# Altium PCB RPI 3.PcbDoc
Units mil, origin at the board's own origin, x right, y up, seen from the top; angles counter-clockwise.
Board outline 2558.74 x 2204.72 mil, 2 copper layers (Top Layer, Bottom Layer), stack 67.192 mil thick; 23 components, 43 nets, 141 pads, 0 vias.
Unrouted connection lines stored in the file: 1.
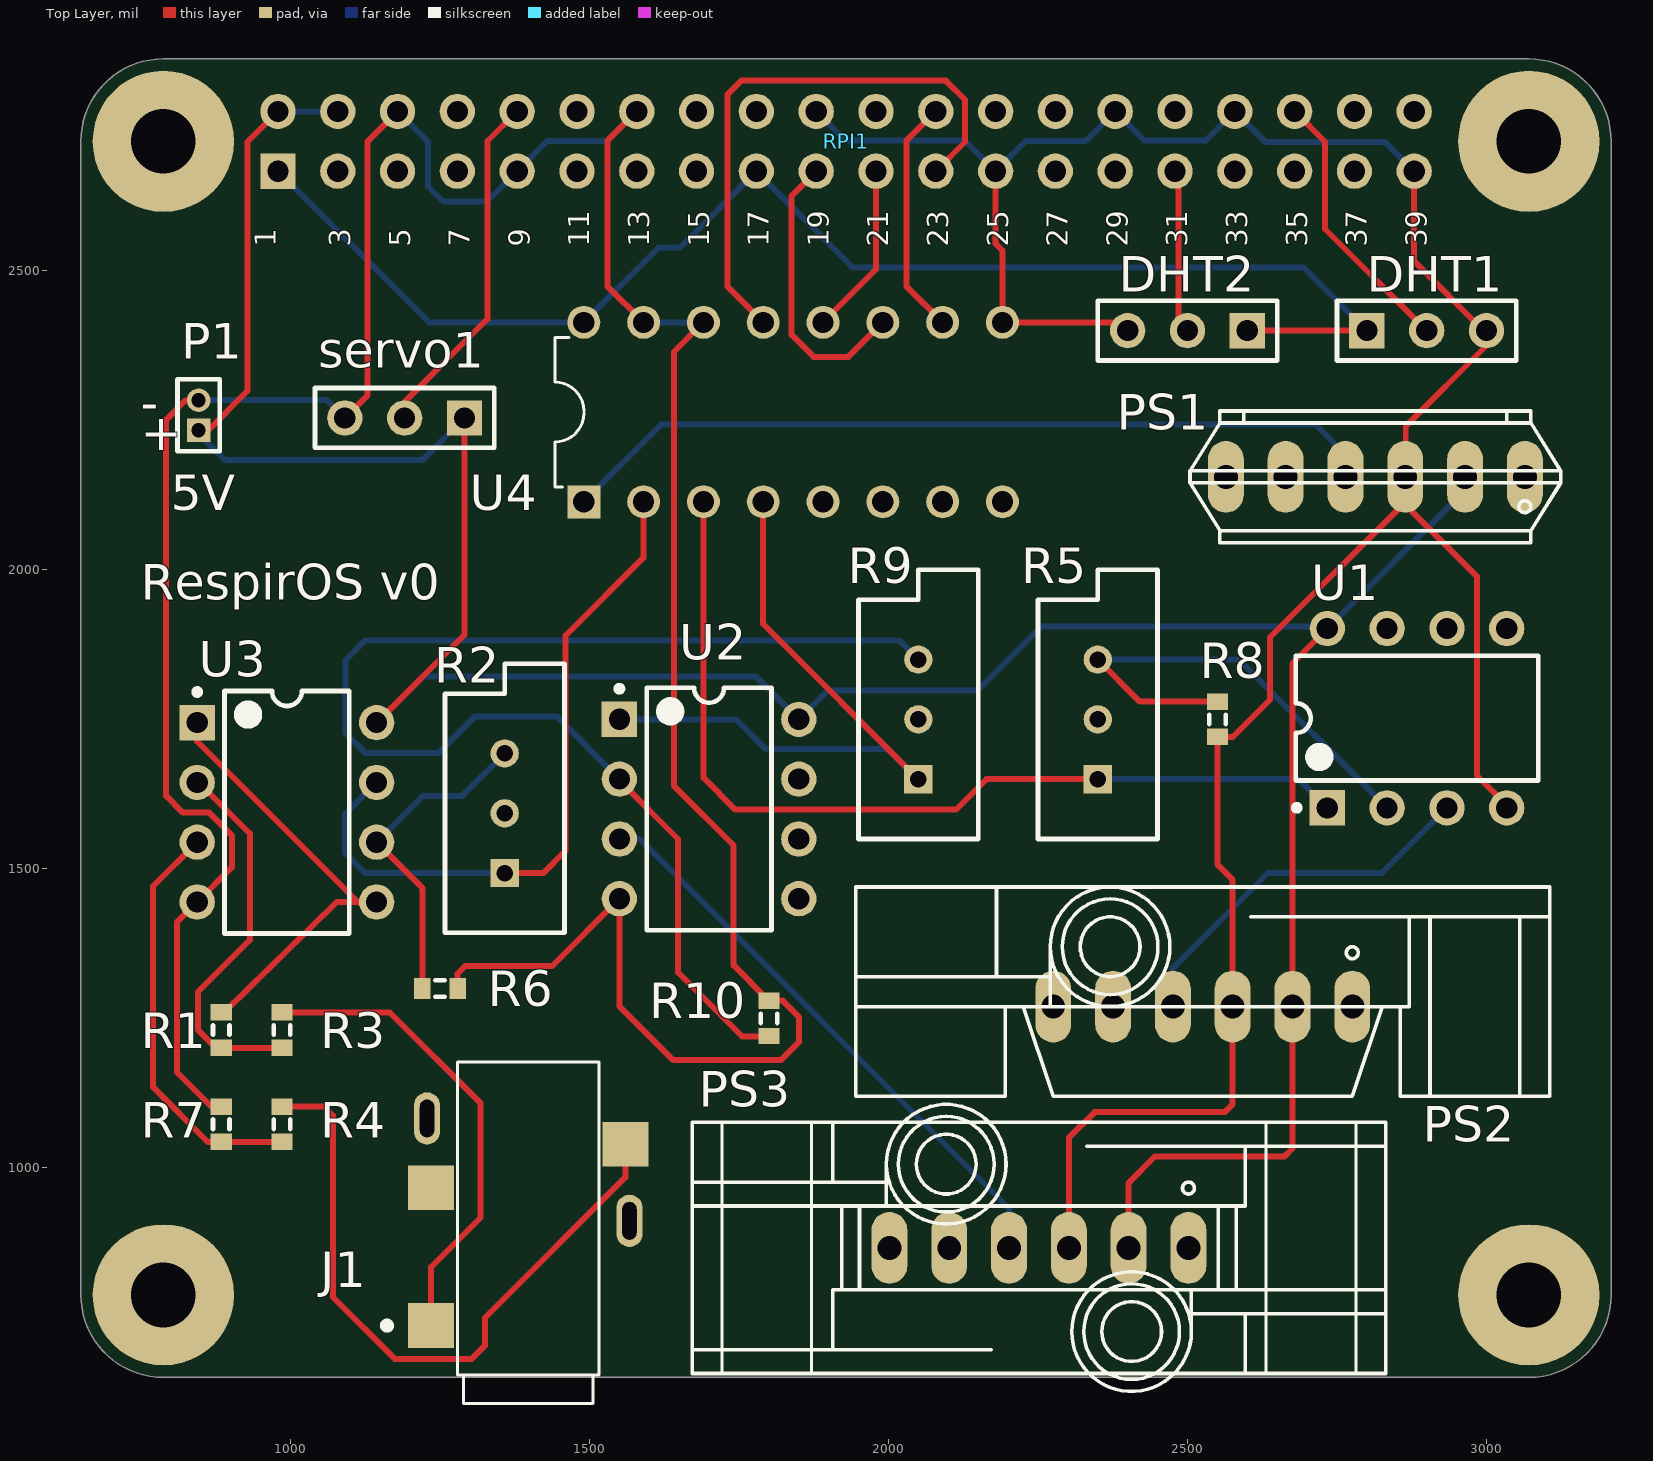
[diagram p0: Top Layer view]
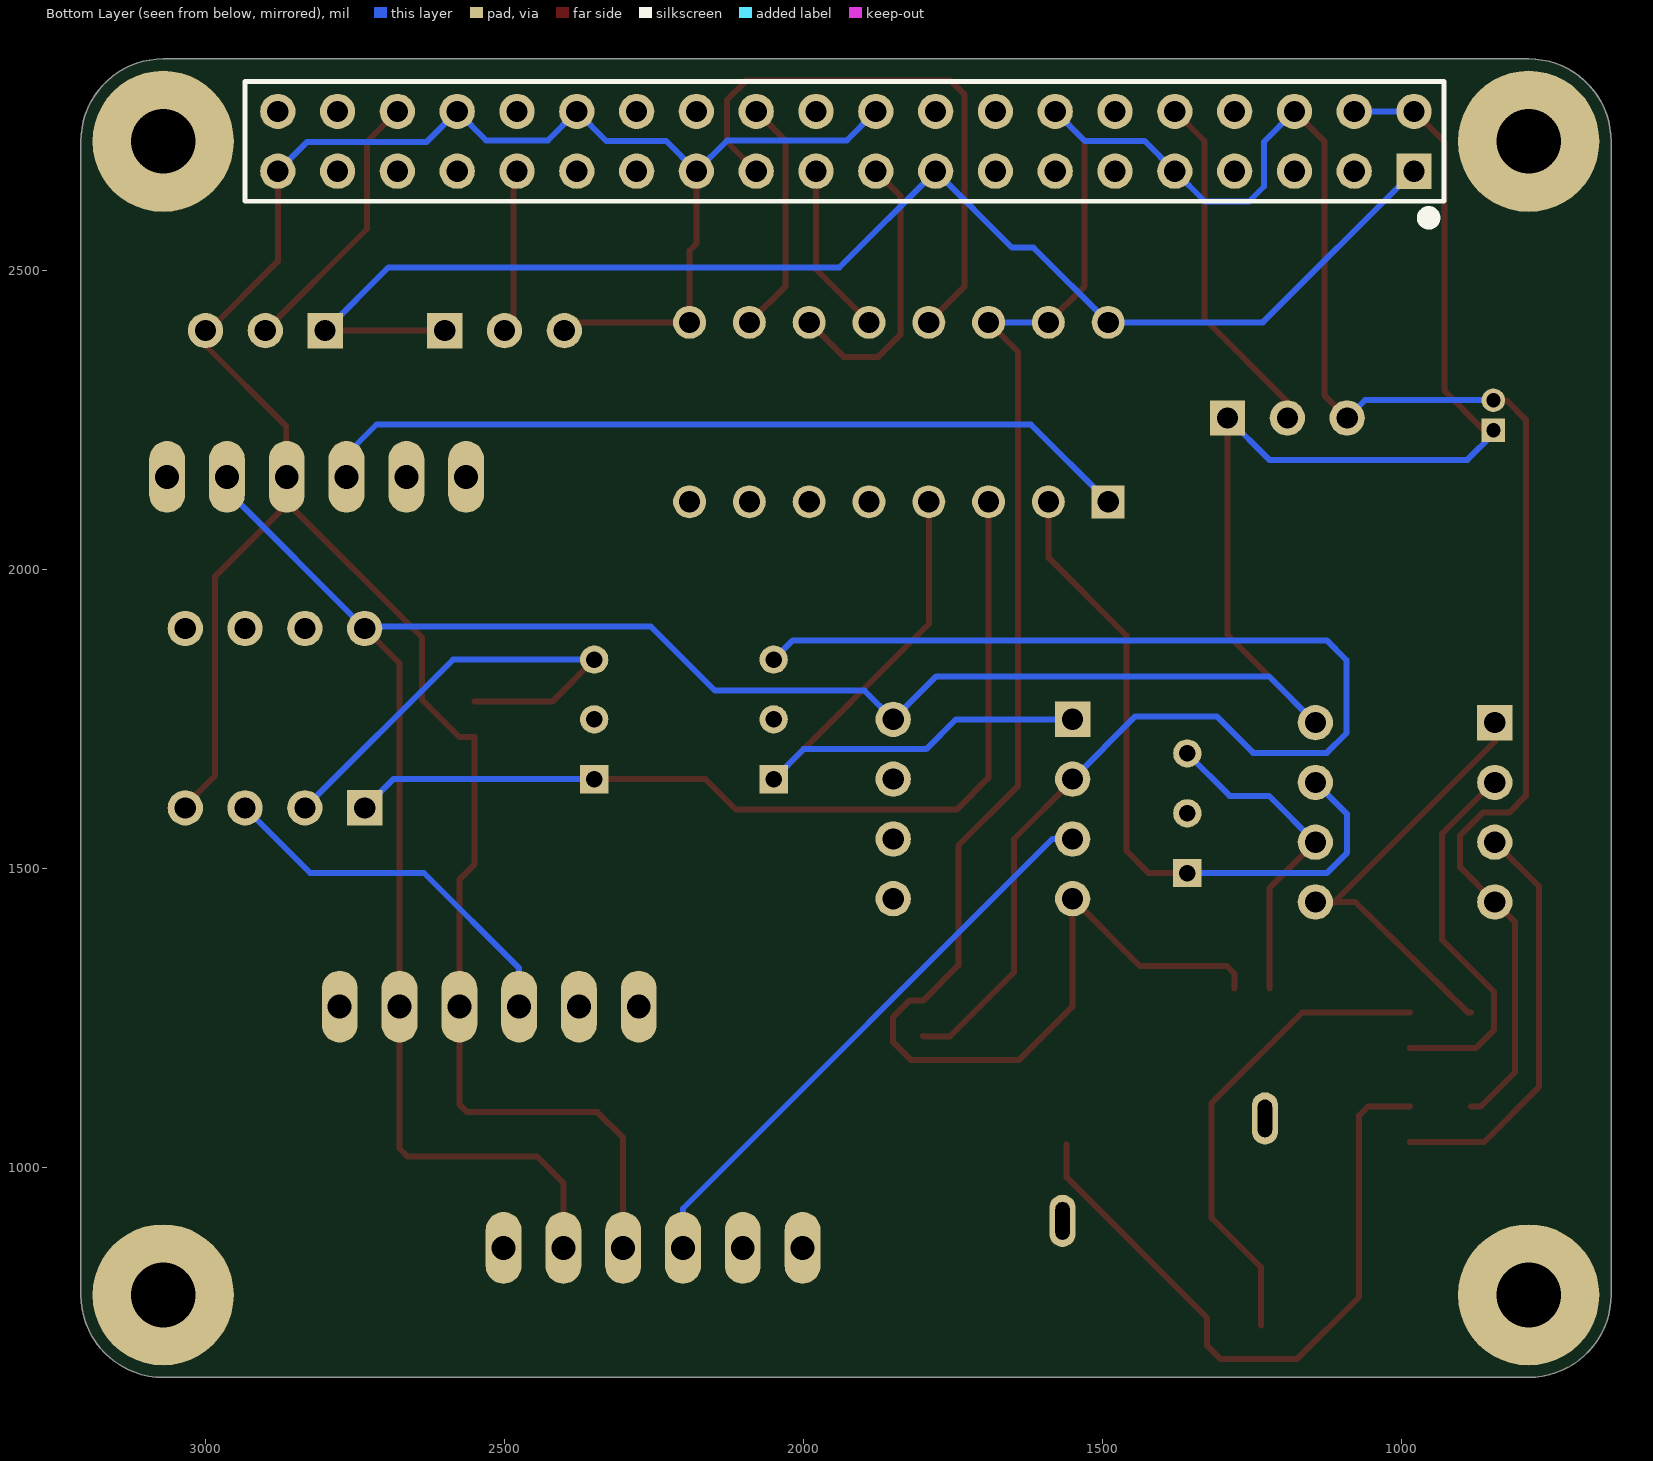
[diagram p1: Bottom Layer view, seen from below]

## Layer stack, top to bottom
Top Solder: solder mask 0.8, Solder Resist, Dk 3.5
Top Layer: signal copper 2.1
Dielectric 1: dielectric 62.9921, FR-4, Dk 4.6
Bottom Layer: signal copper 2.1
Bottom Solder: solder mask 0.8, Solder Resist, Dk 3.5

## Board outline
649.61,787.4 ccw(c787.4,787.4) 787.4,649.61 3070.87,649.61 ccw(c3070.71,787.24) 3208.35,787.4 3208.35,2716.54 ccw(c3070.71,2716.69) 3070.87,2854.33 787.4,2854.33 ccw(c787.4,2716.54) 649.61,2716.54

## Design rules (kind name [scope] priority, off if disabled: settings)
Clearance [All] p1: gap=10 ignorepadtopadclearanceinfootprint=FALSE
PolygonConnect [All] p1: connectstyle=Relief reliefconductorwidth=10 reliefentries=4 polygonreliefangle="90 Angle" airgapwidth=10
RoutingVias [All] p1: holewidth=28 width=50 viastyle="Through Hole" minholewidth=28 minwidth=50 maxholewidth=28 maxwidth=50
SMDNeckDown [All] p1: percent=100.000
SolderMaskExpansion [All] p1: expansion=4
Width [All] p1: maxlimit=10 minlimit=10 preferedwidth=10
30 further rules are at their usual default settings.

## Components (designator, comment, footprint, x,y, rotation, side; value= is the part's Value field where it differs from the comment)
DHT1 "Header 3" HDR1X3 2800,2400 r0 top
DHT2 "Header 3" HDR1X3 2600,2400 r180 top
J1 "SJ2-35983D-SMT-TR" CUI_SJ2-35983D-SMT-TR 1397.64,915.35 r90 top
P1 "MHDR1X2" MHDR1X2 846.46,2233.46 r90 top
PS1 "MPX2202A" *867-V 2814.17,2155.51 r180 top
PS2 "MPX2202GP" *867B-V 2525.59,1269.68 r180 top
PS3 "MPX2202DP" *867C-V 2251.57,866.14 r180 top
R1 "Res3" J1-0603 884.25,1230.32 r90 top value=1K
R2 "RPot" VR5 1358.27,1592.91 r90 top value=50K
R3 "Res3" J1-0603 985.83,1230.32 r90 top value=1K
R4 "Res3" J1-0603 985.83,1072.83 r90 top value=1K
R5 "RPot" VR5 2350,1750 r90 top value=50K
R6 "Res3" J1-0603 1250,1300 r180 top value=1K
R7 "Res3" J1-0603 884.25,1072.83 r90 top value=1K
R8 "Res3" J1-0603 2550,1750 r90 top value=1K
R9 "RPot" VR5 2050,1750 r90 top value=50K
R10 "Res3" J1-0603 1800,1250 r270 top value=1K
RPI1 "RPI GPIO Connector" RPI 1929.13,2716.54 r180 top
servo1 "Header 3" HDR1X3 1290.94,2253.94 r180 top
U1 "LT366" DIP-8 2883.86,1751.97 r90 top
U2 "LT366" DIP-8 1700,1600 r0 top
U3 "LT366" DIP-8 994.09,1594.49 r0 top
U4 "MCU-MCP3008-I/P(DIP16-7.62MM)" DIP16-2.54-19.2X7.62MM 1840.55,2263.78 r0 top

## Footprints (in the part's own frame and the unit in brackets; to place one, negate y for a bottom-side part, rotate by r counter-clockwise, add the part's x,y. Pads: shape width x height; smd on the part's side, far side on the other; paste and mask are expansions set on the pad)
*867-V [mil]
  oval 60x120 hole 40: 1(-250,0) 2(-150,0) 3(-50,0) 4(50,0) 5(150,0) 6(250,0)
  silkscreen extent -310,-110 310,110
*867B-V [mil]
  oval 60x120 hole 40: 1(-250,0) 2(-150,0) 3(-50,0) 4(50,0) 5(150,0) 6(250,0)
  silkscreen extent -580,-200 580,150
*867C-V [mil]
  oval 60x120 hole 40: 1(-250,0) 2(-150,0) 3(-50,0) 4(50,0) 5(150,0) 6(250,0)
  silkscreen extent -580,-240 580,240
CUI_SJ2-35983D-SMT-TR [mm]
  rect 1.9x1.95 smd: 1(-4.55,4.125) 2(3.15,-4.125) 3(1.3,4.125)
  oval 2.216x1.108 hole 0.6 slot 1.6 at 0 deg: 10(4.25,4.3) 11(-0.1,-4.3)
  silkscreen extent -7.85,-3 6.65,6.15
DIP16-2.54-19.2X7.62MM [mm]
  rect 1.4x1.4 hole 0.9: 1(-8.89,-3.81)
  round 1.4 hole 0.9: 2(-6.35,-3.81) 3(-3.81,-3.81) 4(-1.27,-3.81) 5(1.27,-3.81) 6(3.81,-3.81) 7(6.35,-3.81) 8(8.89,-3.81) 9(8.89,3.81) 10(6.35,3.81) 11(3.81,3.81) 12(1.27,3.81) 13(-1.27,3.81) 14(-3.81,3.81) 15(-6.35,3.81) 16(-8.89,3.81)
  silkscreen extent -10.11,-3.17 -8.89,3.18
DIP-8 [mm] "DIP; 8 Leads; Row Spacing 7.62 mm; Pitch 2.54 mm"
  rect 1.5x1.5 hole 0.9: 1(-3.81,3.81)
  round 1.5 hole 0.9: 2(-3.81,1.27) 3(-3.81,-1.27) 4(-3.81,-3.81) 5(3.81,-3.81) 6(3.81,-1.27) 7(3.81,1.27) 8(3.81,3.81)
  silkscreen extent -3.93,-5.15 2.65,5.23, body extent -3.6,-5.15 3.6,5.15, height 5.08
HDR1X3 [mm] "Connector; Header; 3 Position"
  rect 1.5x1.5 hole 0.9: 1(0,0)
  round 1.5 hole 0.9: 2(2.54,0) 3(5.08,0)
  silkscreen extent -1.27,-1.27 6.35,1.27
J1-0603 [mm] "Chip Resistor, Body 1.6x0.8mm, IPC High Density"
  rect 0.7x0.9 smd: 1(-0.75,0) 2(0.75,0)
  silkscreen extent -0.2,-0.35 0.2,0.35, body extent -0.85,-0.48 0.85,0.48, height 0.9
MHDR1X2 [mm] "Connector; Header; 2 Position"
  rect 1x1 hole 0.6: 1(0,0)
  round 1 hole 0.6: 2(1.27,0)
  silkscreen extent -0.9,-0.9 2.17,0.9
RPI [mm]
  rect 1.5x1.5 hole 0.9: 1(24.13,1.27)
  round 1.5 hole 0.9: 2(24.13,-1.27) 3(21.59,1.27) 4(21.59,-1.27) 5(19.05,1.27) 6(19.05,-1.27) 7(16.51,1.27) 8(16.51,-1.27) 9(13.97,1.27) 10(13.97,-1.27) 11(11.43,1.27) 12(11.43,-1.27) 13(8.89,1.27) 14(8.89,-1.27) 15(6.35,1.27) 16(6.35,-1.27) 17(3.81,1.27) 18(3.81,-1.27) 19(1.27,1.27) 20(1.27,-1.27) 21(-1.27,1.27) 22(-1.27,-1.27) 23(-3.81,1.27) 24(-3.81,-1.27) 25(-6.35,1.27) 26(-6.35,-1.27) 27(-8.89,1.27) 28(-8.89,-1.27) 29(-11.43,1.27) 30(-11.43,-1.27) 31(-13.97,1.27) 32(-13.97,-1.27) 33(-16.51,1.27) 34(-16.51,-1.27) 35(-19.05,1.27) 36(-19.05,-1.27) 37(-21.59,1.27) 38(-21.59,-1.27) 39(-24.13,1.27) 40(-24.13,-1.27)
  body extent -25.52,-2.63 25.53,2.38, height 8.5
VR5 [mm] "Thru-Hole; 3 Leads"
  rect 1.2x1.2 hole 0.7: 1(-2.54,0)
  round 1.2 hole 0.7: 2(0,0) 3(2.54,0)
  silkscreen extent -5.08,-2.54 6.35,2.54

## Part data
DHT1 DHT2 servo1: "Header, 3-Pin", LatestRevisionDate=17-Jul-2002, LatestRevisionNote="Re-released for DXP Platform.", Publisher="Altium Limited"
J1: "3 conductor, 3.5 mm, SMT Audio Jack w/ 2 switch", Package=None, Availability=Unavailable, MP=SJ2-35983D-SMT-TR, Price=None
P1: "Header, 2-Pin", LatestRevisionDate=17-Jul-2002, LatestRevisionNote="Re-released for DXP Platform.", Publisher="Altium Limited"
PS1 PS2 PS3: library part MPX*****, "Low-Side Gate Driver IC Inverting, Non-Inverting 6-MLP (2x2)", Package="SOT-223-4 Texas Instruments", Availability=Bad, Check_prices=https://www.snapeda.com/parts/MPX/ON%20Semiconductor/view-part/121742/?ref=eda, MF="ON Semiconductor", MP=MPX, Price=None, SnapEDA_Link=https://www.snapeda.com/parts/MPX/ON%20Semiconductor/view-part/121742/?ref=snap
R1 R3 R4 R6 R7 R8 R10: "Resistor", LatestRevisionDate=29-May-2009, LatestRevisionNote="IPC-7351 Footprint Added.", PackageDescription="Chip Resistor", PackageReference=J1-0603, Published=8-Jun-2000, Publisher="Altium Limited"
R2 R5 R9: "Potentiometer", LatestRevisionDate=17-Jul-2002, LatestRevisionNote="Re-released for DXP Platform.", PackageDescription="Variable Resistor, Thru-Hole; 3 Leads", PackageReference=VR5, Published=8-Jun-2000, Publisher="Altium Limited", Set Position=0.5, Sim Note="Enter the Resistance value and the set point into parameter fields."
RPI1: library part "rpi connector", "GPIO Header for Raspberry Pi A+/B+/Pi 2/Pi 3 - 2x20", Manufacturer="SparkFun Electronics", Manufacturer Part Number=PRT-14017, Supplier Part Number 1=1568-1462-ND, Accessory Type=Connector, Category="Development Boards, Kits, Programmers", ComponentLink1Description=https://cdn.sparkfun.com/datasheets/Dev/RaspberryPi/12313.pdf, ComponentLink1URL=https://cdn.sparkfun.com/datasheets/Dev/RaspberryPi/12313.pdf, For Use With/Related Products="Raspberry Pi", Nils Minor=author, nilsminor@web.de=mail, Part Status=Active, Pricing 1="1=1.84 (EUR)", RoHS="RoHS Compliant", Stock 1=150, Supplier 1=Digi-Key
U1 U2 U3: library part LM358P, "Dual Operational Amplifiers", Package="PDIP-8 Texas Instruments", Arrow_Electronics-Purchase-URL=https://snapeda.com/shop?store=Arrow+Electronics&id=559457, Availability=Unavailable, DigiKey-Purchase-URL=https://snapeda.com/shop?store=DigiKey&id=559457, MF="Texas Instruments", Mouser-Purchase-URL=https://snapeda.com/shop?store=Mouser&id=559457, MP=LM358P, Price=None, SnapEDA_Link=https://www.snapeda.com/parts/LM358P/Texas%20Instruments/view-part/559457/?ref=snap, Texas_Instruments-Purchase-URL=https://snapeda.com/shop?store=Texas+Instruments&id=559457
U4: "10 Bit Analog to Digital Converter 4, 8 Input 1 SAR 16-PDIP", Package="DIP-16 Microchip", Availability=Unavailable, MF=Microchip, MP=MCP3008-I/P, Price=None, SnapEDA_Link=https://www.snapeda.com/parts/MCP3008-I/P/Microchip/view-part/43628/?ref=snap

## Free pads (board coordinates)
  round 236.22 hole 108.27: ""(787.4,787.4) ""(787.4,2716.54) ""(3070.87,787.4) ""(3070.87,2716.54)

## Nets (pads, with @x,y where several pads share a name; then routed paths per layer and width w, separated by ;. In a path a pad name is that pad's centre, name@x,y a point inside that pad or via, vN(x,y) a via of type N, cw(c..) or ccw(c..) an arc to the next point about the centre after c; other vN are vias at no path point)
+3V3: DHT1.1 DHT2.1 RPI1.1 RPI1.17 U4.16 | length 2340.7
  Top Layer w10: DHT2.1 DHT1.1
  Bottom Layer w10: RPI1.1 1231.89,2413.78 U4.16 1615.77,2539 1651.6,2539 RPI1.17 1940.07,2505.6 2694.4,2505.6 DHT1.1
+5V: P1.1 PS1.2 PS2.2 PS3.2 RPI1.2 RPI1.4 servo1.1 U1.8 U2.8 U3.8 | length 5162.7
  Top Layer w10: P1.1 862.46,2233.46 928,2299 928,2715.4 RPI1.2 ; U3.8 1290.94,1891.34 servo1.1 ; PS3.2 2401.57,975 2445.75,1019.18 2662.5,1019.18 2675.59,1032.27 PS2.2 2675.59,1843.7 U1.8
  Bottom Layer w10: P1.1@846,2232 846,2228 890,2184 1221.01,2184 servo1.1 ; RPI1.2 RPI1.4 ; U3.8 1221.61,1822 1778,1822 U2.8 1898,1798 2148,1798 2255,1905 2730.83,1905 U1.8 2963,2131.11 PS1.2@2963,2165 ; PS1.2@2964.17,2132.17 PS1.2
GND: DHT1.3 DHT2.3 P1.2 PS1.3 PS2.3 PS3.3 R6.1 R7.2 R8.1 R10.1 RPI1.6 RPI1.9 RPI1.14 RPI1.20 RPI1.25 RPI1.30 RPI1.34 RPI1.39 servo1.3 U1.4 U2.4 U3.4 U4.9 U4.14 U4.15 | length 9928.4
  Top Layer w10: P1.2 824.46,2283.46 792,2251 792,1622 820,1594 863.92,1594 902,1555.92 902,1502.39 U3.4 810,1410.39 810,1160.36 868,1102.36 R7.2 ; servo1.3 1129,2291.99 1129,2716.4 RPI1.6 ; R6.1 1279.53,1325 1292.03,1337.5 1437.5,1337.5 U2.4 1550,1270 1640,1180 1820,1180 1850,1210 1850,1252.53 1823,1279.53 R10.1 1741,1338.53 1741,1539 1641,1639 1641,2364.23 U4.14 ; RPI1.14 1530,2717.4 1530,2474.33 U4.15 ; RPI1.25 2179.13,2545.42 2190.55,2534 U4.9 2386.22,2413.78 DHT2.3 ; PS3.3 2301.57,1050 2344.75,1093.18 2562.5,1093.18 2575.59,1106.27 PS2.3 2575.59,1482 2550,1507.59 R8.1 2575.47,1720.47 2638,1783 2638,1887 2864,2113 2864,2109 2984,1989 2984,1656 3033.86,1606.14 U1.4 ; PS1.3@2864,2138.5 PS1.3@2864,2154 ; PS1.3@2865,2160 2865,2240 3000,2375 DHT1.3 ; RPI1.39 2879.13,2515.87 DHT1.3@2995,2400
  Bottom Layer w10: P1.2 846.99,2284 1060.88,2284 servo1.3 ; RPI1.6 1230,2715.67 1230,2641 1255,2616 1328.6,2616 RPI1.9 1429.6,2717 1529.6,2717 RPI1.14 ; U4.15 U4.14 ; RPI1.20 1927.67,2718 2127.67,2718 RPI1.25 2229.6,2717 2329.6,2717 RPI1.30 2427.67,2718 2530.6,2718 RPI1.34 2630.67,2715 2830.67,2715 RPI1.39
NetDHT1_2: DHT1.2 RPI1.36 | length 458
  Top Layer w10: RPI1.36 2730,2715.67 2730,2570 DHT1.2
NetDHT2_2: DHT2.2 RPI1.31 | length 275.2
  Top Layer w10: RPI1.31 2485,2660.67 2485,2415 DHT2.2
NetJ1_1: J1.1 R3.2 | length 801.1
  Top Layer w10: R3.2 1166.16,1259.84 1318,1108 1318,917 1235.24,834.24 J1.1
NetJ1_2: J1.2 R4.2 | length 1135.5
  Top Layer w10: R4.2 1056.14,1102.36 1071,1087.5 1071,784 1175,680 1302.5,680 1325,702.5 1325,748.96 1560.04,984 J1.2
NetPS1_4: PS1.4 U4.1 | length 1382.1
  Bottom Layer w10: U4.1 1619.77,2243 2714,2243 2765,2192 PS1.4@2765,2159
NetPS2_4: PS2.4 U1.3 | length 633.6
  Bottom Layer w10: PS2.4 2475.59,1334 2634.59,1493 2824.89,1493 U1.3
NetPS3_4: PS3.4 U2.3 | length 973.4
  Bottom Layer w10: U2.3 1583.57,1550 2201.57,932 PS3.4
NetR1_1: R1.1 R3.1 U3.2 | length 640.4
  Top Layer w10: U3.2@845,1646 932,1559 932,1381 845,1294 845,1231 875.21,1200.79 R1.1 R3.1
NetR1_2: R1.2 U3.1 U3.5 | length 776.1
  Top Layer w10: U3.1 844.09,1712.91 1112.51,1444.49 ; R1.2 889.3,1259.84 1077.65,1444.49 1112.51,1444.49 ; U3.5@1142,1444 1113,1444 1112.51,1444.49 ; U3.5 1112.51,1444.49
NetR2_1: R2.1 U3.7 U4.2 | length 1171.9
  Top Layer w10: R2.1 1422.91,1492.91 1460,1530 1460,1890 1590,2020 U4.2@1590,2110
  Bottom Layer w10: U3.7 1091,1591.39 1091,1526.91 1125,1492.91 R2.1
NetR2_3: R2.3 R6.2 U3.6 | length 551.8
  Top Layer w10: U3.6 1220.47,1468.11 R6.2
  Bottom Layer w10: U3.6 1221.61,1622 1287.35,1622 R2.3
NetR4_1: R4.1 R7.1 U3.3 | length 693.8
  Top Layer w10: U3.3 770,1470.39 770,1135.31 862,1043.31 R7.1 R4.1
NetR5_1: R5.1 U1.1 U4.3 | length 1562.7
  Top Layer w10: U4.3@1693,2108 1691,2106 1691,1652 1744,1599 2113,1599 2164,1650 R5.1
  Bottom Layer w10: R5.1 2685.83,1650 U1.1
NetR5_3: R5.3 R8.2 U1.2 | length 815.8
  Top Layer w10: R5.3 2420.47,1779.53 R8.2
  Bottom Layer w10: R5.3 2585.83,1850 U1.2
NetR9_1: R9.1 U2.1 U4.4 | length 1112.7
  Top Layer w10: U4.4 1790.55,1909.45 R9.1
  Bottom Layer w10: U2.1 1745,1750 1795,1700 2000,1700 R9.1
NetR9_3: R9.3 R10.2 U2.2 | length 2205.5
  Top Layer w10: U2.2@1550,1648 1648.03,1549.97 1648.03,1326.97 1755,1220 1799.53,1220 R10.2
  Bottom Layer w10: U2.2 1445,1755 1309,1755 1248,1694 1125,1694 1092,1727 1092,1849 1125,1882 2018,1882 R9.3
NetRPI1_3: RPI1.3
NetRPI1_5: RPI1.5
NetRPI1_7: RPI1.7
NetRPI1_8: RPI1.8
NetRPI1_10: RPI1.10 servo1.2 | length 590.5
  Top Layer w10: servo1.2 1190.94,2280.94 1329.6,2419.6 1329.6,2717 RPI1.10
NetRPI1_11: RPI1.11
NetRPI1_12: RPI1.12
NetRPI1_13: RPI1.13
NetRPI1_15: RPI1.15
NetRPI1_16: RPI1.16
NetRPI1_18: RPI1.18
NetRPI1_19: RPI1.19 U4.11 | length 482.4
  Top Layer w10: RPI1.19 1838,2625.4 1838,2393 1875,2356 1932.77,2356 U4.11
NetRPI1_21: RPI1.21 U4.12 | length 289.4
  Top Layer w10: U4.12 1979.13,2502.36 RPI1.21
NetRPI1_22: RPI1.22
NetRPI1_23: RPI1.23 U4.13 | length 965.4
  Top Layer w10: U4.13 1731,2473.33 1731,2795 1754,2818 2096,2818 2128,2786 2128,2715.4 RPI1.23
NetRPI1_24: RPI1.24 U4.10 | length 398.2
  Top Layer w10: RPI1.24 2030,2717.4 2030,2474.33 U4.10
NetRPI1_26: RPI1.26
NetRPI1_29: RPI1.29
NetRPI1_32: RPI1.32
NetRPI1_33: RPI1.33
NetRPI1_35: RPI1.35
NetRPI1_37: RPI1.37
NetRPI1_38: RPI1.38
NetRPI1_40: RPI1.40
pads on no net: J1.3 J1.10 J1.11 PS1.1 PS1.5 PS1.6 PS2.1 PS2.5 PS2.6 PS3.1 PS3.5 PS3.6 R2.2 R5.2 R9.2 RPI1.27 RPI1.28 U1.5 U1.6 U1.7 U2.5 U2.6 U2.7 U4.5 U4.6 U4.7 U4.8

## Silkscreen, mask and mechanical layers (free items; w line width, h text height)
Top Overlay:
  text "1" at 975,2540.16 h35 r90
  text "3" at 1100,2540.16 h35 r90
  text "5" at 1200,2540.16 h35 r90
  text "7" at 1300,2540.16 h35 r90
  text "9" at 1400,2540.16 h35 r90
  text "11" at 1500,2540.16 h35 r90
  text "13" at 1600,2540.16 h35 r90
  text "15" at 1700,2540.16 h35 r90
  text "17" at 1800,2540.16 h35 r90
  text "19" at 1900,2540.16 h35 r90
  text "21" at 2000,2540.16 h35 r90
  text "23" at 2100,2540.16 h35 r90
  text "25" at 2200,2540.16 h35 r90
  text "27" at 2300,2540.16 h35 r90
  text "29" at 2400,2540.16 h35 r90
  text "31" at 2500,2540.16 h35 r90
  text "33" at 2600,2540.16 h35 r90
  text "35" at 2700,2540.16 h35 r90
  text "37" at 2800,2540.16 h35 r90
  text "39" at 2900,2540.16 h35 r90
  text "-" at 750,2250 h60
  text "+" at 750,2200 h60
  text "5V" at 800,2100 h60
  text "RespirOS v0" at 750,1950 h60
Bottom Overlay:
  circle w19.68: c954.72,2588.58 r9.84
M2: Outline:
  the board outline again, w10